# EAGLE board ALU (EAGLE 9.3.2)
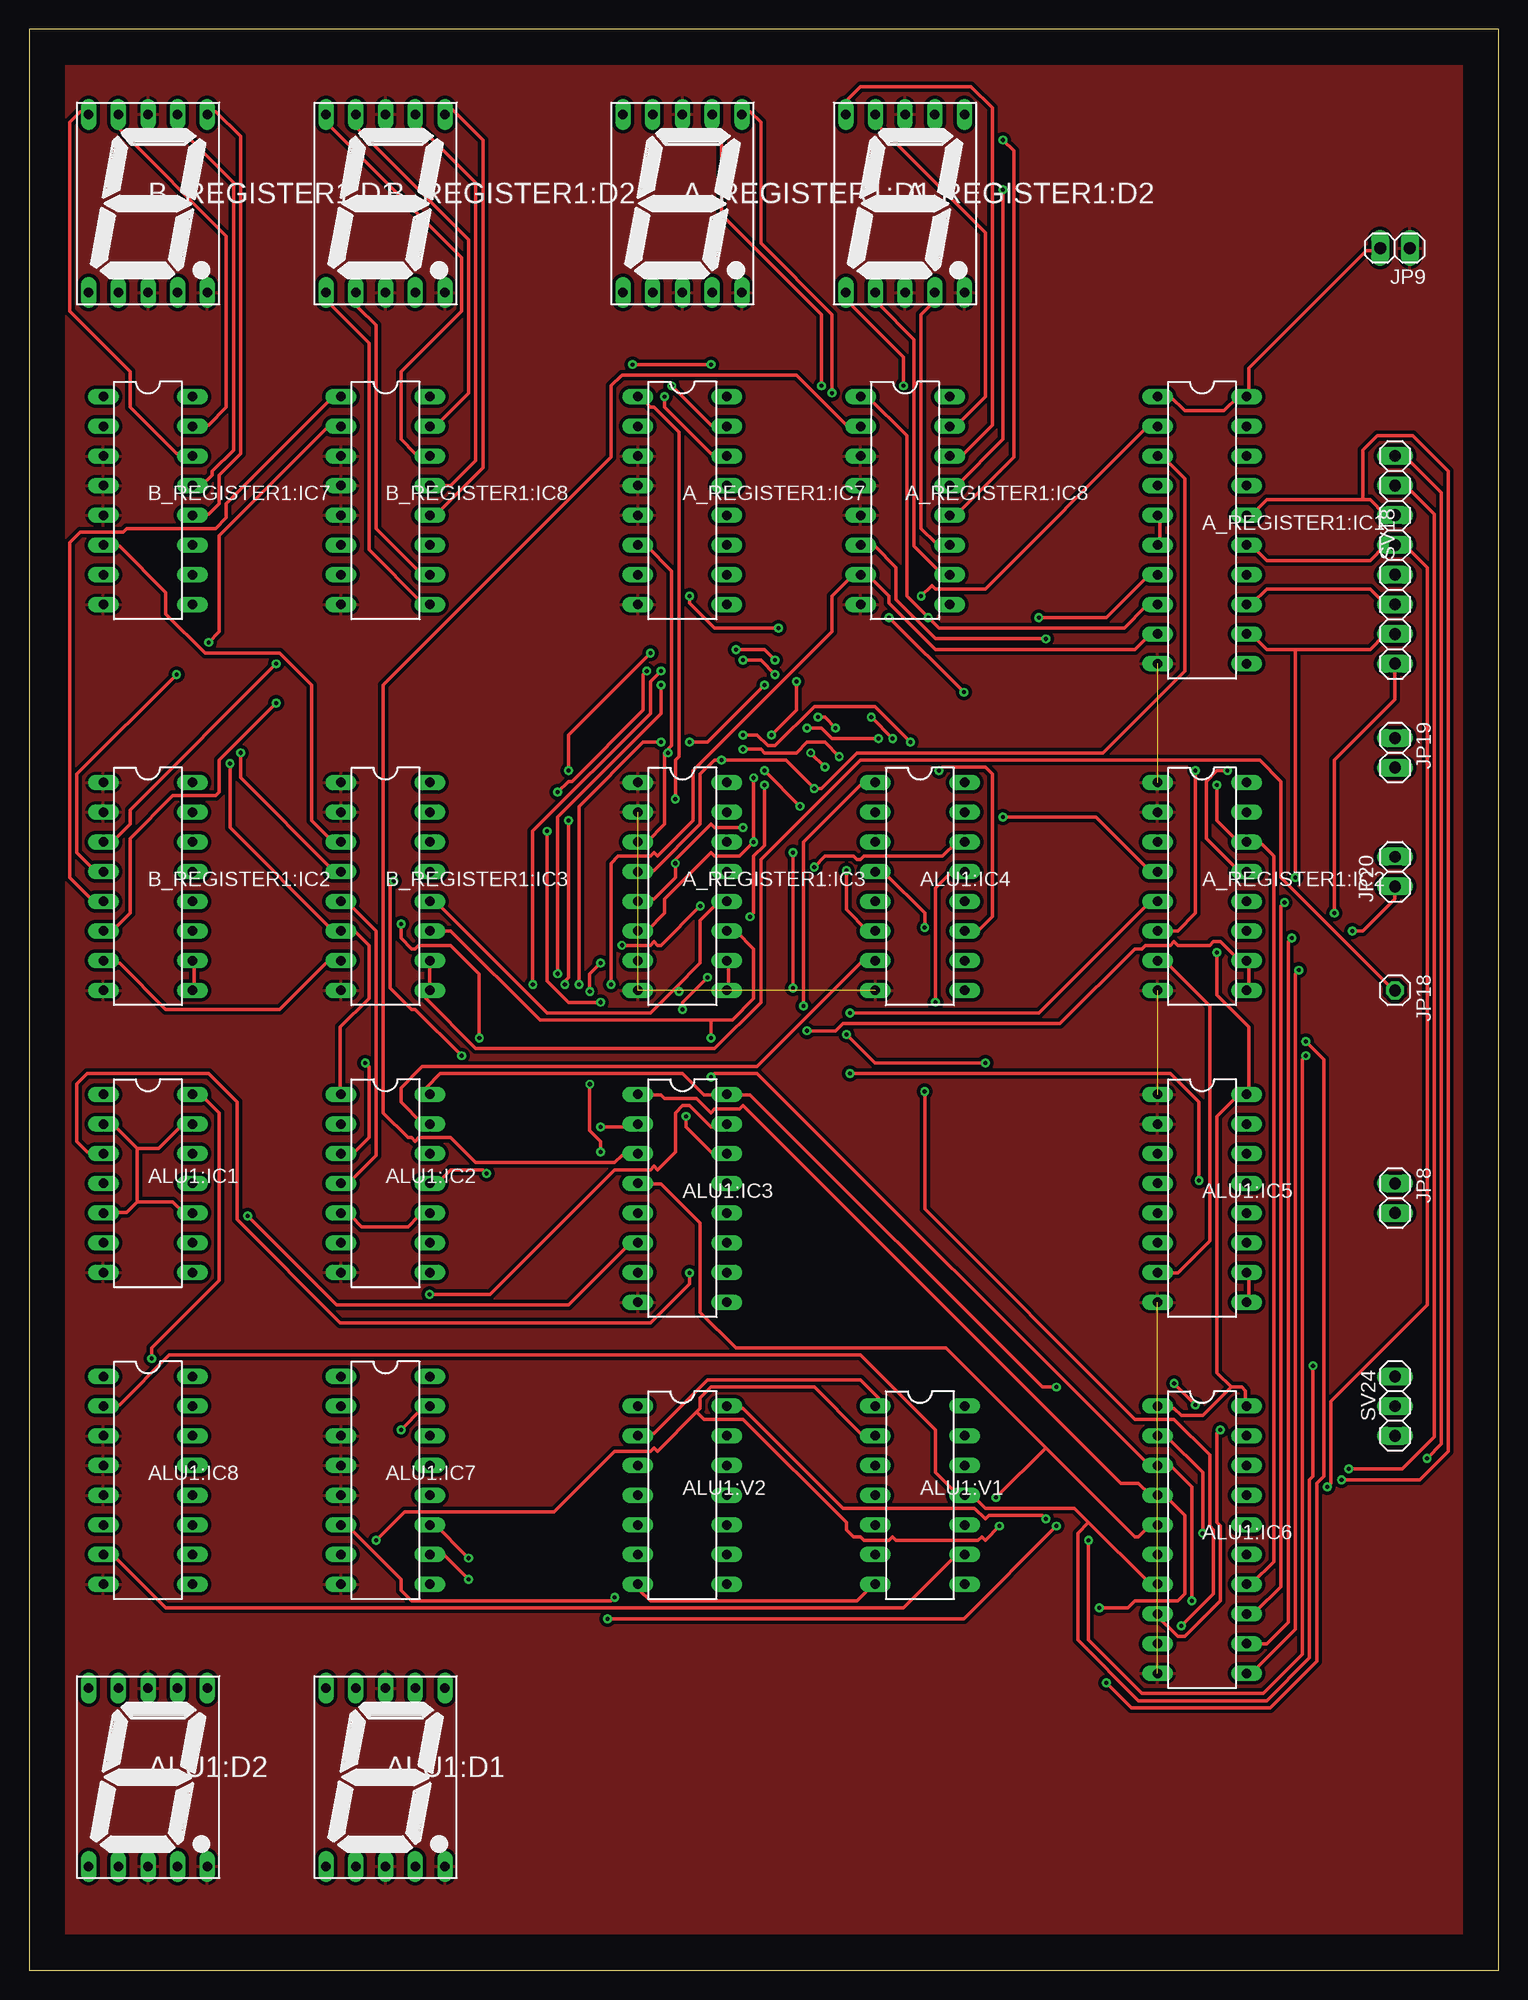
[diagram p0: board, top side]
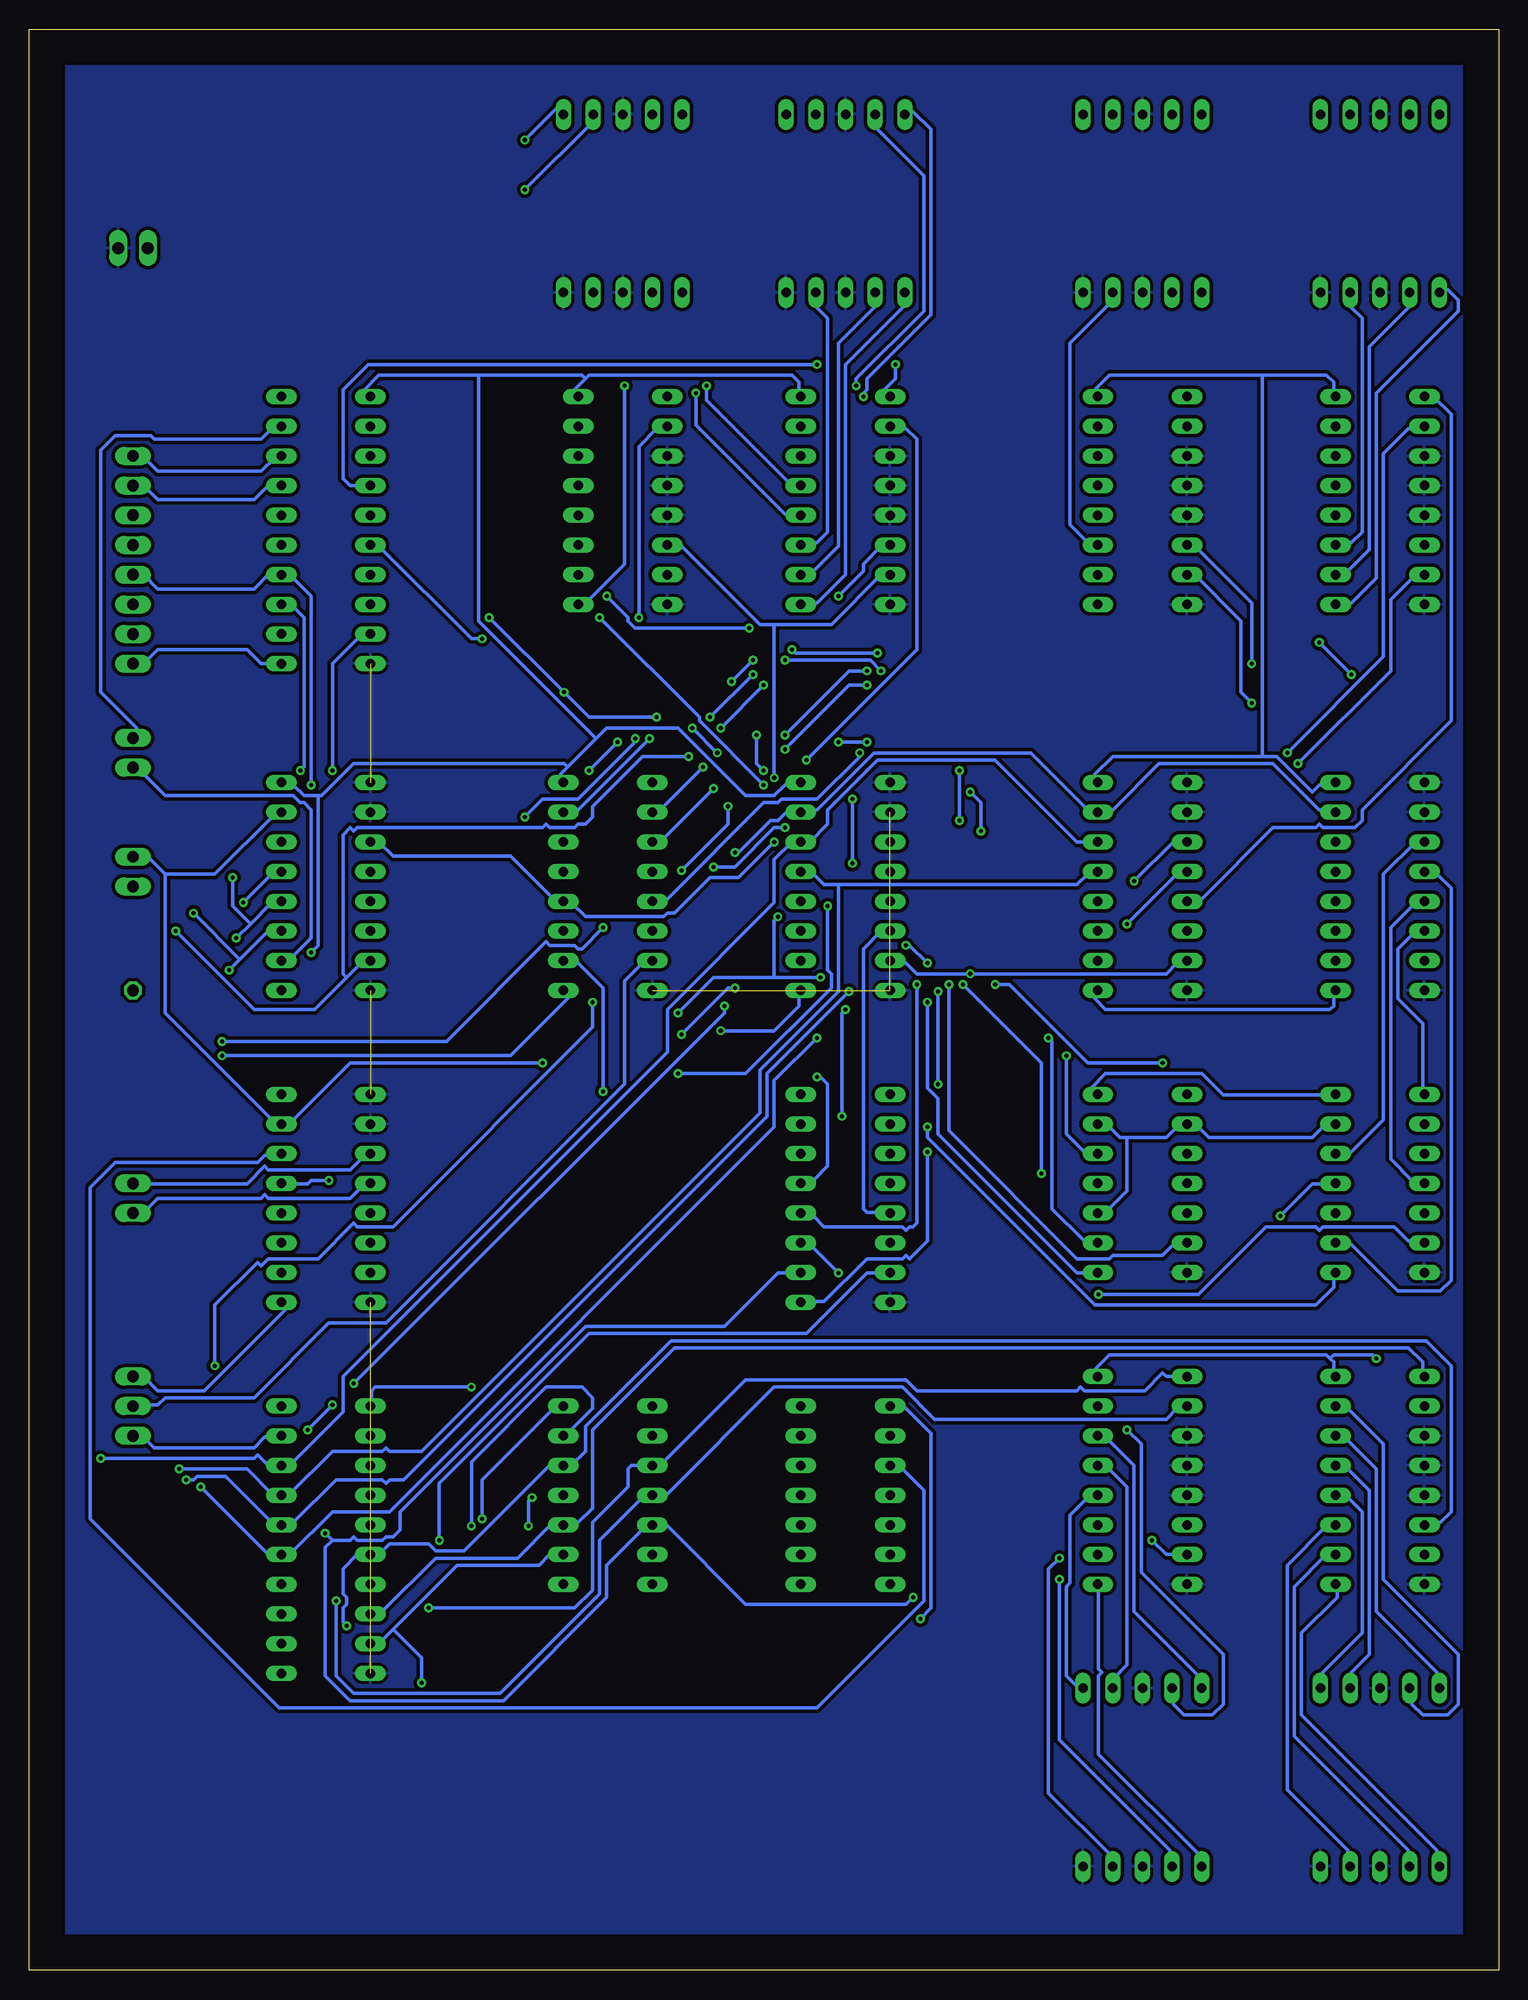
[diagram p1: board, bottom side, seen from below]

Size 125.71 x 166.04 mm. Coordinates in mm from the lower left corner, seen from the top.
Outline: 0,0 125.71,0 125.71,166.04 0,166.04 0,0
Copper layers (1*16): Top 0.035mm / dielectric 1.5mm / Bottom 0.035mm
Design rules "Endustriyel": minimum track width 12mil, minimum drill 0.35mm, track to track 12mil, track to pad 12mil, pad to pad 12mil, via to via 12mil, smd to smd 6mil, copper to edge 120mil, drill to drill 12mil, minimum pad ring 10mil, minimum via ring 8mil, stop-mask expansion 4mil, vias tented up to drill 0mil, thermal gap 10mil
Net classes: 0 default: width 0.254 mm

## Footprints (pad centres in the part's own frame; a part is rotated, then mirrored left to right if it is on the bottom)
7SEG-13 = drill 0.813 long: 1 -5.08,-7.62; 2 -2.54,-7.62; 3 0,-7.62; 4 2.54,-7.62; 5 5.08,-7.62; 6 5.08,7.62; 7 2.54,7.62; 8 0,7.62; 9 -2.54,7.62; 10 -5.08,7.62
DIL20 = drill 0.813 long: 1 -11.43,-3.81; 2 -8.89,-3.81; 3 -6.35,-3.81; 4 -3.81,-3.81; 5 -1.27,-3.81; 6 1.27,-3.81; 7 3.81,-3.81; 8 6.35,-3.81; 9 8.89,-3.81; 10 11.43,-3.81; 11 11.43,3.81; 12 8.89,3.81; 13 6.35,3.81; 14 3.81,3.81; 15 1.27,3.81; 16 -1.27,3.81; 17 -3.81,3.81; 18 -6.35,3.81; 19 -8.89,3.81; 20 -11.43,3.81
DIL16 = drill 0.813 long: 1 -8.89,-3.81; 2 -6.35,-3.81; 3 -3.81,-3.81; 4 -1.27,-3.81; 5 1.27,-3.81; 6 3.81,-3.81; 7 6.35,-3.81; 8 8.89,-3.81; 9 8.89,3.81; 10 6.35,3.81; 11 3.81,3.81; 12 1.27,3.81; 13 -1.27,3.81; 14 -3.81,3.81; 15 -6.35,3.81; 16 -8.89,3.81
DIL14 = drill 0.813 long: 1 -7.62,-3.81; 2 -5.08,-3.81; 3 -2.54,-3.81; 4 0,-3.81; 5 2.54,-3.81; 6 5.08,-3.81; 7 7.62,-3.81; 8 7.62,3.81; 9 5.08,3.81; 10 2.54,3.81; 11 0,3.81; 12 -2.54,3.81; 13 -5.08,3.81; 14 -7.62,3.81
1X02 = drill 1.016 long: 1 -1.27,0; 2 1.27,0
1X01 = drill 1.016 octagon: 1 0,0
1X08 = drill 1.016 long: 1 -8.89,0; 2 -6.35,0; 3 -3.81,0; 4 -1.27,0; 5 1.27,0; 6 3.81,0; 7 6.35,0; 8 8.89,0
1X03 = drill 1.016 long: 1 -2.54,0; 2 0,0; 3 2.54,0

## Placement (x,y rotation side)
A_REGISTER1:D1  [7SEG-13]  55.88,151.13 0 top
A_REGISTER1:D2  [7SEG-13]  74.93,151.13 0 top
A_REGISTER1:IC1  74ACT245N  [DIL20]  100.33,123.19 270 top
A_REGISTER1:IC2  74HC173N  [DIL16]  100.33,92.71 270 top
A_REGISTER1:IC3  74HC173N  [DIL16]  55.88,92.71 270 top
A_REGISTER1:IC7  74LS47N  [DIL16]  55.88,125.73 270 top
A_REGISTER1:IC8  74LS47N  [DIL16]  74.93,125.73 270 top
ALU1:D1  [7SEG-13]  30.48,16.51 0 top
ALU1:D2  [7SEG-13]  10.16,16.51 0 top
ALU1:IC1  74LS86N  [DIL14]  10.16,67.31 270 top
ALU1:IC2  74LS86N  [DIL14]  30.48,67.31 270 top
ALU1:IC3  74AC283N  [DIL16]  55.88,66.04 270 top
ALU1:IC4  74AC283N  [DIL16]  76.2,92.71 270 top
ALU1:IC5  74HC173N  [DIL16]  100.33,66.04 270 top
ALU1:IC6  74ACT245N  [DIL20]  100.33,36.83 270 top
ALU1:IC7  74LS47N  [DIL16]  30.48,41.91 270 top
ALU1:IC8  74LS47N  [DIL16]  10.16,41.91 270 top
ALU1:V1  744002N  [DIL14]  76.2,40.64 270 top
ALU1:V2  7409N  [DIL14]  55.88,40.64 270 top
B_REGISTER1:D1  [7SEG-13]  10.16,151.13 0 top
B_REGISTER1:D2  [7SEG-13]  30.48,151.13 0 top
B_REGISTER1:IC2  74HC173N  [DIL16]  10.16,92.71 270 top
B_REGISTER1:IC3  74HC173N  [DIL16]  30.48,92.71 270 top
B_REGISTER1:IC7  74LS47N  [DIL16]  10.16,125.73 270 top
B_REGISTER1:IC8  74LS47N  [DIL16]  30.48,125.73 270 top
JP8  [1X02]  116.84,66.04 270 top
JP9  [1X02]  116.84,147.32 180 top
JP18  [1X01]  116.84,83.82 270 top
JP19  [1X02]  116.84,104.14 270 top
JP20  [1X02]  116.84,93.98 90 top
SV18  [1X08]  116.84,120.65 90 top
SV24  [1X03]  116.84,48.26 270 top

## Library data of the parts
A_REGISTER1:D1 A_REGISTER1:D2 ALU1:D1 ALU1:D2 B_REGISTER1:D1 B_REGISTER1:D2 = special
A_REGISTER1:IC1-A_REGISTER1:IC3 A_REGISTER1:IC7 A_REGISTER1:IC8 ALU1:IC3-ALU1:IC8 B_REGISTER1:IC2 B_REGISTER1:IC3 B_REGISTER1:IC7 B_REGISTER1:IC8 = 74xx-eu
ALU1:IC1 ALU1:IC2 = 74xx-us
ALU1:V1 ALU1:V2 = 74ttl-din
JP8 JP9 JP18-JP20 = pinhead
SV18 SV24 = pinhead; OC_FARNELL: unknown; OC_NEWARK: unknown

## Nets
8B_1: A_REGISTER1:IC1.18 A_REGISTER1:IC3.14 ALU1:IC6.18 B_REGISTER1:IC3.14 SV18.8
8B_2: A_REGISTER1:IC1.17 A_REGISTER1:IC3.13 ALU1:IC6.17 B_REGISTER1:IC3.13 SV18.7
8B_3: A_REGISTER1:IC1.16 A_REGISTER1:IC3.12 ALU1:IC6.16 B_REGISTER1:IC3.12 SV18.6
8B_4: A_REGISTER1:IC1.15 A_REGISTER1:IC3.11 ALU1:IC6.15 B_REGISTER1:IC3.11 SV18.5
8B_5: A_REGISTER1:IC1.14 A_REGISTER1:IC2.14 ALU1:IC6.14 SV18.4
8B_6: A_REGISTER1:IC1.13 A_REGISTER1:IC2.13 ALU1:IC6.13 SV18.3
8B_7: A_REGISTER1:IC1.12 A_REGISTER1:IC2.12 ALU1:IC6.12 SV18.2
8B_8: A_REGISTER1:IC1.11 A_REGISTER1:IC2.11 ALU1:IC6.11 SV18.1
A_REGISTER1:N$9: A_REGISTER1:D1.7 A_REGISTER1:IC7.13
A_REGISTER1:N$10: A_REGISTER1:D1.6 A_REGISTER1:IC7.12
A_REGISTER1:N$11: A_REGISTER1:D1.4 A_REGISTER1:IC7.11
A_REGISTER1:N$12: A_REGISTER1:D1.2 A_REGISTER1:IC7.10
A_REGISTER1:N$13: A_REGISTER1:D1.1 A_REGISTER1:IC7.9
A_REGISTER1:N$14: A_REGISTER1:D1.9 A_REGISTER1:IC7.15
A_REGISTER1:N$15: A_REGISTER1:D1.10 A_REGISTER1:IC7.14
A_REGISTER1:N$16: A_REGISTER1:D2.7 A_REGISTER1:IC8.13
A_REGISTER1:N$21: A_REGISTER1:D2.6 A_REGISTER1:IC8.12
A_REGISTER1:N$22: A_REGISTER1:D2.4 A_REGISTER1:IC8.11
A_REGISTER1:N$23: A_REGISTER1:D2.2 A_REGISTER1:IC8.10
A_REGISTER1:N$24: A_REGISTER1:D2.1 A_REGISTER1:IC8.9
A_REGISTER1:N$29: A_REGISTER1:D2.9 A_REGISTER1:IC8.15
A_REGISTER1:N$30: A_REGISTER1:D2.10 A_REGISTER1:IC8.14
ALU1:+UB: ALU1:V1.14 ALU1:V2.14
ALU1:-UB: ALU1:V1.7 ALU1:V2.7
ALU1:A_9: ALU1:IC4.4 ALU1:IC6.9 ALU1:IC8.7 ALU1:V1.9
ALU1:A_10: ALU1:IC4.1 ALU1:IC6.8 ALU1:IC8.1 ALU1:V1.10
ALU1:A_11: ALU1:IC4.10 ALU1:IC6.6 ALU1:IC8.6 ALU1:V1.12
ALU1:A_12: ALU1:IC4.13 ALU1:IC6.7 ALU1:IC8.2 ALU1:V1.11
ALU1:A_13: ALU1:IC3.4 ALU1:IC6.5 ALU1:IC7.7 ALU1:V1.2
ALU1:A_14: ALU1:IC3.1 ALU1:IC6.4 ALU1:IC7.1 ALU1:V1.3
ALU1:A_15: ALU1:IC3.13 ALU1:IC6.3 ALU1:IC7.2 ALU1:V1.4
ALU1:A_16: ALU1:IC3.10 ALU1:IC6.2 ALU1:IC7.6 ALU1:V1.5
ALU1:N$1: ALU1:IC2.11 ALU1:IC4.6
ALU1:N$2: ALU1:IC2.8 ALU1:IC4.2
ALU1:N$3: ALU1:IC2.6 ALU1:IC4.15
ALU1:N$4: ALU1:IC2.3 ALU1:IC4.11
ALU1:N$5: ALU1:IC1.11 ALU1:IC3.6
ALU1:N$6: ALU1:IC1.6 ALU1:IC3.15
ALU1:N$7: ALU1:IC1.8 ALU1:IC3.2
ALU1:N$8: ALU1:IC1.3 ALU1:IC3.11
ALU1:N$9: ALU1:IC3.7 ALU1:IC4.9
ALU1:N$10: ALU1:D1.7 ALU1:IC7.13
ALU1:N$11: ALU1:D1.6 ALU1:IC7.12
ALU1:N$12: ALU1:D1.4 ALU1:IC7.11
ALU1:N$13: ALU1:D1.2 ALU1:IC7.10
ALU1:N$14: ALU1:D1.1 ALU1:IC7.9
ALU1:N$15: ALU1:D1.9 ALU1:IC7.15
ALU1:N$16: ALU1:D1.10 ALU1:IC7.14
ALU1:N$17: ALU1:D2.7 ALU1:IC8.13
ALU1:N$18: ALU1:V1.1 ALU1:V2.2
ALU1:N$19: ALU1:V1.13 ALU1:V2.1
ALU1:N$20: ALU1:IC5.14 ALU1:V2.3
ALU1:N$21: ALU1:D2.6 ALU1:IC8.12
ALU1:N$22: ALU1:D2.4 ALU1:IC8.11
ALU1:N$23: ALU1:D2.2 ALU1:IC8.10
ALU1:N$24: ALU1:D2.1 ALU1:IC8.9
ALU1:N$25: ALU1:IC3.9 ALU1:IC5.13
ALU1:N$29: ALU1:D2.9 ALU1:IC8.15
ALU1:N$30: ALU1:D2.10 ALU1:IC8.14
B_REGISTER1:8B_9: B_REGISTER1:IC2.11
B_REGISTER1:8B_10: B_REGISTER1:IC2.12
B_REGISTER1:8B_11: B_REGISTER1:IC2.13
B_REGISTER1:8B_12: B_REGISTER1:IC2.14
B_REGISTER1:N$9: B_REGISTER1:D1.7 B_REGISTER1:IC7.13
B_REGISTER1:N$10: B_REGISTER1:D1.6 B_REGISTER1:IC7.12
B_REGISTER1:N$11: B_REGISTER1:D1.4 B_REGISTER1:IC7.11
B_REGISTER1:N$12: B_REGISTER1:D1.2 B_REGISTER1:IC7.10
B_REGISTER1:N$13: B_REGISTER1:D1.1 B_REGISTER1:IC7.9
B_REGISTER1:N$14: B_REGISTER1:D1.9 B_REGISTER1:IC7.15
B_REGISTER1:N$15: B_REGISTER1:D1.10 B_REGISTER1:IC7.14
B_REGISTER1:N$16: B_REGISTER1:D2.7 B_REGISTER1:IC8.13
B_REGISTER1:N$21: B_REGISTER1:D2.6 B_REGISTER1:IC8.12
B_REGISTER1:N$22: B_REGISTER1:D2.4 B_REGISTER1:IC8.11
B_REGISTER1:N$23: B_REGISTER1:D2.2 B_REGISTER1:IC8.10
B_REGISTER1:N$24: B_REGISTER1:D2.1 B_REGISTER1:IC8.9
B_REGISTER1:N$29: B_REGISTER1:D2.9 B_REGISTER1:IC8.15
B_REGISTER1:N$30: B_REGISTER1:D2.10 B_REGISTER1:IC8.14
B_REGISTER1:VCC: B_REGISTER1:IC2.16 B_REGISTER1:IC3.16 B_REGISTER1:IC7.16 B_REGISTER1:IC8.16
CF: ALU1:IC5.4 JP8.2
CLK: A_REGISTER1:IC2.7 A_REGISTER1:IC3.7 ALU1:IC5.7 B_REGISTER1:IC2.7 B_REGISTER1:IC3.7 JP20.1
CLR: A_REGISTER1:IC2.15 A_REGISTER1:IC3.15 ALU1:IC5.15 B_REGISTER1:IC2.15 B_REGISTER1:IC3.15 JP20.2
GND: A_REGISTER1:D1.3 A_REGISTER1:D1.5 A_REGISTER1:D1.8 A_REGISTER1:D2.3 A_REGISTER1:D2.5 A_REGISTER1:D2.8 A_REGISTER1:IC1.10 A_REGISTER1:IC2.1 A_REGISTER1:IC2.2 A_REGISTER1:IC2.8 A_REGISTER1:IC3.1 A_REGISTER1:IC3.2 A_REGISTER1:IC3.8 A_REGISTER1:IC7.3 A_REGISTER1:IC7.4 A_REGISTER1:IC7.5 A_REGISTER1:IC7.8 A_REGISTER1:IC8.3 A_REGISTER1:IC8.4 A_REGISTER1:IC8.5 A_REGISTER1:IC8.8 ALU1:D1.3 ALU1:D1.5 ALU1:D1.8 ALU1:D2.3 ALU1:D2.5 ALU1:D2.8 ALU1:IC1.7 ALU1:IC2.7 ALU1:IC3.8 ALU1:IC4.8 ALU1:IC5.1 ALU1:IC5.2 ALU1:IC5.8 ALU1:IC6.10 ALU1:IC7.3 ALU1:IC7.4 ALU1:IC7.5 ALU1:IC7.8 ALU1:IC8.3 ALU1:IC8.4 ALU1:IC8.5 ALU1:IC8.8 B_REGISTER1:D1.3 B_REGISTER1:D1.5 B_REGISTER1:D1.8 B_REGISTER1:D2.3 B_REGISTER1:D2.5 B_REGISTER1:D2.8 B_REGISTER1:IC2.1 B_REGISTER1:IC2.2 B_REGISTER1:IC2.8 B_REGISTER1:IC3.1 B_REGISTER1:IC3.2 B_REGISTER1:IC3.8 B_REGISTER1:IC7.3 B_REGISTER1:IC7.4 B_REGISTER1:IC7.5 B_REGISTER1:IC7.8 B_REGISTER1:IC8.3 B_REGISTER1:IC8.4 B_REGISTER1:IC8.5 B_REGISTER1:IC8.8 JP9.1
N$17: A_REGISTER1:IC1.2 A_REGISTER1:IC3.3 A_REGISTER1:IC7.6 ALU1:IC4.5
N$18: A_REGISTER1:IC1.3 A_REGISTER1:IC3.4 A_REGISTER1:IC7.2 ALU1:IC4.3
N$19: A_REGISTER1:IC1.4 A_REGISTER1:IC3.5 A_REGISTER1:IC7.1 ALU1:IC4.14
N$20: A_REGISTER1:IC1.5 A_REGISTER1:IC1.6 A_REGISTER1:IC2.3 A_REGISTER1:IC3.6 A_REGISTER1:IC7.7 A_REGISTER1:IC8.6 ALU1:IC3.5 ALU1:IC4.12
N$21: A_REGISTER1:IC1.7 A_REGISTER1:IC2.4 A_REGISTER1:IC8.2 ALU1:IC3.3
N$22: A_REGISTER1:IC1.8 A_REGISTER1:IC2.5 A_REGISTER1:IC8.1 ALU1:IC3.14
N$23: A_REGISTER1:IC1.9 A_REGISTER1:IC2.6 A_REGISTER1:IC8.7 ALU1:IC3.12
N$24: ALU1:IC2.12 B_REGISTER1:IC3.3 B_REGISTER1:IC7.6
N$25: ALU1:IC2.9 B_REGISTER1:IC3.4 B_REGISTER1:IC7.2
N$26: ALU1:IC2.4 B_REGISTER1:IC3.5 B_REGISTER1:IC7.1
N$27: ALU1:IC2.1 B_REGISTER1:IC3.6 B_REGISTER1:IC7.7
N$28: ALU1:IC1.12 B_REGISTER1:IC2.3 B_REGISTER1:IC8.6
N$29: ALU1:IC1.9 B_REGISTER1:IC2.4 B_REGISTER1:IC8.2
N$30: ALU1:IC1.4 B_REGISTER1:IC2.5 B_REGISTER1:IC8.1
N$31: ALU1:IC1.1 B_REGISTER1:IC2.6 B_REGISTER1:IC8.7
SUB: ALU1:IC1.2 ALU1:IC1.5 ALU1:IC1.10 ALU1:IC1.13 ALU1:IC2.2 ALU1:IC2.5 ALU1:IC2.10 ALU1:IC2.13 ALU1:IC4.7 SV24.2
VCC: A_REGISTER1:IC1.1 A_REGISTER1:IC1.20 A_REGISTER1:IC2.16 A_REGISTER1:IC3.16 A_REGISTER1:IC7.16 A_REGISTER1:IC8.16 ALU1:IC1.14 ALU1:IC2.14 ALU1:IC3.16 ALU1:IC4.16 ALU1:IC5.16 ALU1:IC6.1 ALU1:IC6.20 ALU1:IC7.16 ALU1:IC8.16 JP9.2
ZF: ALU1:IC5.3 JP8.1
|ALUWRITE: ALU1:IC6.19 SV24.3
|AREAD: A_REGISTER1:IC2.9 A_REGISTER1:IC2.10 A_REGISTER1:IC3.9 A_REGISTER1:IC3.10 JP19.2
|AWRITE: A_REGISTER1:IC1.19 JP19.1
|BREAD: B_REGISTER1:IC2.9 B_REGISTER1:IC2.10 B_REGISTER1:IC3.9 B_REGISTER1:IC3.10 JP18.1
|FL: ALU1:IC5.9 ALU1:IC5.10 SV24.1

## Tracks (layer width: path | path; a pad name or v marks a point on that pad's centre or on a via)
8B_1  (via drill 0.35)
  Top 0.305: v119.58,43.79 120.8,45.01 120.8,126.39 117.75,129.44 116.84,129.44 SV18.8
  Bottom 0.305: A_REGISTER1:IC1.18 104.34,129.44 104.65,129.44 105.87,128.22 114.71,128.22 115.93,129.44 116.84,129.44 SV18.8 | B_REGISTER1:IC3.14 36.07,96.52 43.08,103.53 53.14,103.53 57.4,99.26 57.4,98.04 58.93,96.52 A_REGISTER1:IC3.14 60.45,96.52 61.98,95 61.98,91.34 71.12,82.19 71.12,78.54 98.86,50.8 98.86,47.75 103.43,43.18 ALU1:IC6.18 105.26,43.18 106.17,44.09 106.48,43.79 v119.58,43.79
8B_2  (via drill 0.35)
  Top 0.305: SV18.7 117.75,127 120.19,124.56 120.19,45.62 117.45,42.88 v112.88,42.88
  Bottom 0.305: A_REGISTER1:IC1.17 105.26,127 106.48,125.78 114.71,125.78 115.93,127 SV18.7 | 56.49,92.86 57.71,92.86 58.62,93.78 59.54,93.78 A_REGISTER1:IC3.13 | 56.49,92.86 36.07,92.86 35.15,93.78 34.54,93.78 B_REGISTER1:IC3.13 | 56.49,92.86 56.49,83.72 63.19,77.01 63.19,73.35 92.15,44.4 94.89,44.4 95.2,44.7 95.5,44.4 99.77,44.4 103.43,40.74 104.04,40.74 ALU1:IC6.17 104.34,40.74 104.95,40.74 107.09,42.88 v112.88,42.88
8B_3  (via drill 0.35)
  Top 0.305: 114.1,125.78 114.71,125.78 115.93,124.56 116.84,124.56 SV18.6 | 114.1,125.78 105.87,125.78 104.65,124.56 104.34,124.56 A_REGISTER1:IC1.16 | 55.27,84.02 57.4,86.16 57.4,89.81 58.93,91.34 59.54,91.34 A_REGISTER1:IC3.12 | 55.27,84.02 53.14,81.89 44.3,81.89 34.85,91.34 34.54,91.34 B_REGISTER1:IC3.12 | 55.27,84.02 v55.58,83.72 | 114.1,125.78 114.1,130.05 115.32,131.27 118.36,131.27 121.41,128.22 121.41,44.4 118.97,41.96 v112.27,41.96
  Bottom 0.305: v55.58,83.72 62.59,76.71 62.59,73.05 93.67,41.96 94.89,41.96 95.2,41.66 95.5,41.96 99.47,41.96 103.12,38.3 104.04,38.3 ALU1:IC6.16 104.34,38.3 104.95,38.3 108.91,42.27 111.35,42.27 111.66,41.96 v112.27,41.96
8B_4  (via drill 0.35)
  Top 0.305: 116.84,121.82 115.93,121.82 114.71,120.6 105.87,120.6 104.65,121.82 104.34,121.82 A_REGISTER1:IC1.15 | B_REGISTER1:IC3.11 36.07,88.9 43.69,81.28 58.32,81.28 | 58.32,81.28 60.15,81.28 61.98,83.11 61.98,87.38 60.45,88.9 A_REGISTER1:IC3.11 | 58.32,81.28 v58.32,79.76 | 116.84,121.82 117.75,121.82 119.58,119.99 119.58,56.9 111.35,48.67 111.35,41.66 v111.05,41.35 | 116.84,121.82 SV18.5
  Bottom 0.305: v58.32,79.76 61.98,76.1 61.98,72.14 94.89,39.22 99.77,39.22 103.43,35.56 ALU1:IC6.15 105.26,35.56 v111.05,41.35
8B_5  (via drill 0.35)
  Top 0.305: ALU1:IC6.14 104.34,33.12 104.65,33.12 106.48,34.95 106.48,95.3 105.26,96.52 A_REGISTER1:IC2.14 103.43,96.52 101.6,98.35 v101.6,101.4
  Bottom 0.305: SV18.4 115.93,119.38 114.71,118.16 106.48,118.16 105.26,119.38 A_REGISTER1:IC1.14 103.43,119.38 101.6,117.55 v101.6,101.4
8B_6  (via drill 0.35)
  Top 0.305: A_REGISTER1:IC1.13 104.34,116.94 104.65,116.94 105.87,118.16 114.71,118.16 115.93,116.94 116.84,116.94 SV18.3 | v107.39,91.34 107.09,91.03 107.09,32.82 104.95,30.68 104.34,30.68 ALU1:IC6.13 | v102.51,102.62 101.6,102.62 100.69,101.7 100.69,96.82 103.43,94.08 104.04,94.08 A_REGISTER1:IC2.13
  Bottom 0.305: v107.39,91.34 104.95,93.78 104.34,93.78 A_REGISTER1:IC2.13 | v102.51,102.62 102.21,102.92 102.21,115.72 103.12,116.64 104.04,116.64 A_REGISTER1:IC1.13
8B_7  (via drill 0.35)
  Top 0.305: 108.31,112.98 114.71,112.98 115.93,114.2 116.84,114.2 SV18.2 | 108.31,112.98 105.87,112.98 104.65,114.2 104.34,114.2 A_REGISTER1:IC1.12 | ALU1:IC6.12 105.87,27.94 107.7,29.77 107.7,87.99 v108,88.29 | v108.31,93.47 108.31,112.98
  Bottom 0.305: 106.78,89.51 104.95,91.34 104.34,91.34 A_REGISTER1:IC2.12 | 106.78,89.51 v108,88.29 | v108.31,93.47 108.31,91.03 106.78,89.51
8B_8  (via drill 0.35)
  Top 0.305: v108.61,85.55 108.31,85.24 108.31,29.16 104.65,25.5 104.34,25.5 ALU1:IC6.11 | SV18.1 116.84,108.71 111.66,103.53 v111.66,90.42
  Bottom 0.305: A_REGISTER1:IC1.11 105.87,111.76 107.09,112.98 114.71,112.98 115.93,111.76 SV18.1 | 107.7,86.46 105.26,88.9 A_REGISTER1:IC2.11 | 107.7,86.46 v108.61,85.55 | 107.7,86.46 v111.66,90.42
A_REGISTER1:N$9  (via drill 0.35)
  Top 0.305: v67.77,135.53 67.77,141.63 59.23,150.17 59.23,156.87 58.62,157.48 58.62,158.7 A_REGISTER1:D1.7
  Bottom 0.305: A_REGISTER1:IC7.13 60.45,127 67.77,134.31 v67.77,135.53
A_REGISTER1:N$10  (via drill 0.35)
  Top 0.305: v68.68,134.93 68.68,141.63 62.59,147.73 62.59,158.09 61.67,159 61.06,159 A_REGISTER1:D1.6
  Bottom 0.305: v68.68,134.93 68.68,132.18 61.06,124.56 59.84,124.56 A_REGISTER1:IC7.12
A_REGISTER1:N$11
  Bottom 0.305: A_REGISTER1:IC7.11 59.54,122.12 58.32,122.12 57.4,123.04 57.4,141.33 58.32,142.24 58.32,143.46 A_REGISTER1:D1.4
A_REGISTER1:N$12
  Bottom 0.305: A_REGISTER1:IC7.10 58.93,119.38 56.49,121.82 56.49,139.19 53.44,142.24 53.44,143.46 A_REGISTER1:D1.2
A_REGISTER1:N$13
  Bottom 0.305: A_REGISTER1:IC7.9 59.54,116.94 58.32,116.94 55.88,119.38 55.88,137.36 51,142.24 51,143.46 A_REGISTER1:D1.1
A_REGISTER1:N$14  (via drill 0.35)
  Top 0.305: v54.97,135.53 58.32,132.18 59.54,132.18 A_REGISTER1:IC7.15
  Bottom 0.305: v54.97,135.53 54.97,136.14 49.17,141.94 49.17,153.52 53.14,157.48 53.14,158.7 A_REGISTER1:D1.9
A_REGISTER1:N$15  (via drill 0.35)
  Top 0.305: v54.36,134.62 54.36,133.71 58.32,129.74 59.54,129.74 A_REGISTER1:IC7.14
  Bottom 0.305: v54.36,134.62 54.36,134.93 54.05,135.23 54.05,136.14 48.56,141.63 48.56,157.48 50.09,159 50.7,159 A_REGISTER1:D1.10
A_REGISTER1:N$16  (via drill 0.35)
  Top 0.305: A_REGISTER1:IC8.13 79.35,127 83.31,130.96 v83.31,152.3
  Bottom 0.305: v83.31,152.3 77.52,158.09 77.52,158.7 A_REGISTER1:D2.7
A_REGISTER1:N$21  (via drill 0.35)
  Top 0.305: v83.31,156.57 84.23,155.65 84.23,129.44 79.35,124.56 78.74,124.56 A_REGISTER1:IC8.12
  Bottom 0.305: v83.31,156.57 80.57,159.31 80.26,159.31 79.96,159 A_REGISTER1:D2.6
A_REGISTER1:N$22
  Top 0.305: A_REGISTER1:IC8.11 78.74,122.12 77.52,122.12 76.3,123.34 76.3,141.63 77.22,142.55 77.22,143.46 A_REGISTER1:D2.4
A_REGISTER1:N$23
  Top 0.305: A_REGISTER1:IC8.10 78.13,119.38 75.69,121.82 75.69,139.5 72.64,142.55 72.64,143.46 A_REGISTER1:D2.2
A_REGISTER1:N$24  (via drill 0.35)
  Top 0.305: v74.78,135.53 74.78,137.97 69.9,142.85 69.9,143.46 A_REGISTER1:D2.1
  Bottom 0.305: v74.78,135.53 74.78,120.29 78.13,116.94 78.74,116.94 A_REGISTER1:IC8.9
A_REGISTER1:N$29
  Top 0.305: A_REGISTER1:IC8.15 78.74,132.18 79.35,132.18 81.79,134.62 81.79,148.64 72.64,157.78 72.64,158.7 A_REGISTER1:D2.9
A_REGISTER1:N$30
  Top 0.305: A_REGISTER1:IC8.14 78.74,129.74 79.96,129.74 82.4,132.18 82.4,159.31 80.57,161.14 71.12,161.14 69.9,159.92 69.9,159 A_REGISTER1:D2.10
ALU1:+UB  (via drill 0.35)
  Top 0.305: v86.97,38.61 86.66,38.91 82.09,38.91 81.79,38.61 80.87,39.52 69.6,39.52 61.06,48.06 59.84,48.06 ALU1:V2.14
  Bottom 0.305: v86.97,38.61 86.97,41.96 80.87,48.06 80.26,48.06 ALU1:V1.14
ALU1:-UB
  Top 0.305: ALU1:V2.7 52.22,32.82 52.22,32.51 53.14,31.6 70.81,31.6 72.34,33.12 ALU1:V1.7
ALU1:A_9  (via drill 0.35)
  Top 0.305: ALU1:IC8.7 7.11,35.56 11.68,30.99 74.78,30.99 79.35,35.56 ALU1:V1.9 | v76.61,89.2 76.61,90.42 73.25,93.78 72.64,93.78 ALU1:IC4.4 | v109.22,79.45 110.74,77.93 110.74,42.27 110.13,41.66 110.13,26.42 106.17,22.45 94.28,22.45 v92.15,24.59
  Bottom 0.305: ALU1:IC6.9 95.81,27.94 94.59,29.16 | 94.59,29.16 89.1,34.65 82.09,34.65 81.18,35.56 ALU1:V1.9 | v76.61,89.2 78.44,87.38 78.74,87.38 79.05,87.68 81.18,87.68 81.48,87.99 90.02,79.45 v109.22,79.45 | v92.15,24.59 92.15,26.72 94.59,29.16
ALU1:A_10  (via drill 0.35)
  Top 0.305: v66.24,82.5 66.24,96.52 71.12,101.4 72.34,101.4 ALU1:IC4.1 | v99.77,48.36 v97.94,50.19 | v101.91,46.23 101.6,45.92 101.6,38.3 101.91,38 101.91,31.6 98.86,28.55 98.25,28.55 96.42,30.38 ALU1:IC6.8
  Bottom 0.305: ALU1:IC8.1 6.5,50.8 6.5,52.02 7.72,53.24 70.51,53.24 77.52,46.23 77.52,39.52 78.74,38.3 79.96,38.3 ALU1:V1.10 80.26,38 81.18,38 83.92,35.26 90.93,35.26 95.5,30.68 96.42,30.68 ALU1:IC6.8 | v66.24,82.5 66.24,81.89 v97.94,50.19 | v101.91,46.23 v99.77,48.36
ALU1:A_11  (via drill 0.35)
  Top 0.305: v76.61,75.18 76.61,65.13 94.59,47.14 97.94,47.14 100.99,44.09 100.99,38 101.3,37.69 101.3,32.21 v98.55,29.46
  Bottom 0.305: ALU1:IC8.6 6.2,38.3 4.98,38.3 4.06,39.22 4.06,51.71 6.2,53.85 70.81,53.85 78.13,46.53 78.13,44.4 79.35,43.18 ALU1:V1.12 81.18,43.18 88.49,35.87 90.93,35.87 91.54,36.47 94.89,36.47 95.81,35.56 ALU1:IC6.6 97.64,35.56 98.86,34.34 98.86,32.21 98.55,31.9 98.55,31.29 98.86,30.99 98.86,29.77 v98.55,29.46 | v76.61,75.18 76.61,84.02 78.74,86.16 79.96,86.16 ALU1:IC4.10
ALU1:A_12  (via drill 0.35)
  Top 0.305: ALU1:IC8.2 6.5,48.36 7.72,48.36 11.99,52.63 71.12,52.63 77.52,46.23 77.52,42.57 79.35,40.74 79.96,40.74 ALU1:V1.11 80.26,40.44 80.87,40.44 81.79,39.52 89.41,39.52 90.63,38.3 | 90.63,38.3 95.81,33.12 96.42,33.12 ALU1:IC6.7 | v77.52,82.8 77.52,92.56 78.74,93.78 79.96,93.78 ALU1:IC4.13 | v109.83,51.71 109.83,42.27 109.52,41.96 109.52,26.72 105.87,23.06 94.89,23.06 89.71,28.25 89.71,37.39 90.63,38.3
  Bottom 0.305: v77.52,82.8 77.52,80.67 94.59,63.6 97.64,63.6 97.94,63.91 100.99,60.86 105.26,60.86 105.87,60.25 106.17,60.55 109.83,56.9 v109.83,51.71
ALU1:A_13  (via drill 0.35)
  Top 0.305: v29.67,36.78 32.11,39.22 44.91,39.22 50.09,44.4 53.14,44.4 53.44,44.7 53.75,44.4 57.1,47.75 | 57.1,47.75 57.4,48.06 57.4,48.97 58.32,49.89 67.16,49.89 71.12,45.92 72.34,45.92 ALU1:V1.2 | 86.97,44.7 94.59,37.08 94.89,37.08 95.81,38 96.42,38 ALU1:IC6.5 | 86.97,44.7 78.44,53.24 60.45,53.24 57.4,56.29 57.4,63.91 54.05,67.26 52.22,67.26 ALU1:IC3.4 | 57.1,47.75 57.71,47.14 61.06,47.14 69.9,38.3 69.9,37.69 70.51,37.08 71.12,37.08 71.42,36.78 73.56,36.78 73.86,37.08 74.17,36.78 81.18,36.78 81.48,37.08 81.79,36.78 v83.01,38 | 86.97,44.7 v82.7,40.44
  Bottom 0.305: ALU1:IC7.7 28.45,35.56 v29.67,36.78 | v83.01,38 83.01,40.13 v82.7,40.44
ALU1:A_14  (via drill 0.35)
  Top 0.305: ALU1:IC3.1 52.22,74.88 54.05,74.88 54.36,74.57 57.1,74.57 58.32,73.35 58.62,73.66 60.76,73.66 61.06,73.96 93.37,41.66 94.89,41.66 95.81,40.74 96.42,40.74 ALU1:IC6.4 96.72,40.44 97.33,40.44 98.86,38.91 98.86,32.21 98.25,31.6 94.59,31.6 93.98,30.99 v91.54,30.99
  Bottom 0.305: ALU1:IC7.1 28.45,50.8 28.75,51.11 30.28,49.58 35.46,49.58 35.76,49.89 36.07,49.58 49.78,49.58 50.7,50.49 64.41,50.49 71.73,43.18 ALU1:V1.3 74.17,43.18 74.47,42.88 74.47,41.35 77.52,38.3 77.52,32.51 79.05,30.99 v91.54,30.99
ALU1:A_15  (via drill 0.35)
  Top 0.305: v58.32,76.4 58.62,76.71 62.28,76.71 95.81,43.18 ALU1:IC6.3 97.64,43.18 99.47,41.35 v99.47,31.6
  Bottom 0.305: ALU1:IC7.2 26.92,48.06 27.53,48.06 28.45,47.14 48.26,47.14 51,49.89 61.98,49.89 71.12,40.74 72.34,40.74 ALU1:V1.4 72.64,40.44 73.25,40.44 76.91,36.78 76.91,32.21 85.45,23.67 97.94,23.67 99.47,25.2 v99.47,31.6 | v58.32,76.4 58.01,76.4 57.4,75.79 57.4,68.78 58.62,67.56 59.54,67.56 ALU1:IC3.13
ALU1:A_16  (via drill 0.35)
  Top 0.305: v50.09,31.9 49.78,31.6 32.72,31.6 31.8,32.51 31.8,33.43 27.23,38 26.92,38 ALU1:IC7.6 | v100.38,37.39 100.38,42.57 97.33,45.62 96.72,45.62 ALU1:IC6.2
  Bottom 0.305: v50.09,31.9 50.7,31.29 64.41,31.29 71.12,38 72.34,38 ALU1:V1.5 72.64,38 72.95,38 76.3,34.65 76.3,31.9 85.14,23.06 98.25,23.06 100.38,25.2 100.38,36.17 99.77,36.78 | 99.77,36.78 98.25,36.78 97.94,37.08 97.64,36.78 95.5,36.78 95.2,37.08 94.59,37.08 93.98,37.69 93.98,39.22 78.13,55.07 66.24,55.07 61.67,59.64 59.84,59.64 ALU1:IC3.10 | v100.38,37.39 99.77,36.78
ALU1:N$1  (via drill 0.35)
  Top 0.305: v39.12,68.17 38.81,68.48 36.07,68.48 35.15,67.56 34.54,67.56 ALU1:IC2.11 | v45.82,84.33 45.82,84.63 46.13,84.94 v46.13,98.35 | v46.13,102.62 46.13,105.66 v53.14,112.67 | v60.45,112.98 62.89,112.98 v63.8,112.06 | v65.63,110.24 65.63,107.8 v63.5,105.66 | v65.94,99.57 v62.89,102.62 | v69.9,94.08 69.9,90.73 71.73,88.9 ALU1:IC4.6
  Bottom 0.305: v39.12,68.17 39.12,77.62 v45.82,84.33 | v46.13,102.62 v46.13,98.35 | v53.14,112.67 60.15,112.67 v60.45,112.98 | v65.63,110.24 v63.8,112.06 | v63.5,105.66 63.5,103.23 v62.89,102.62 | v65.94,99.57 65.94,98.04 v69.9,94.08
ALU1:N$2  (via drill 0.35)
  Top 0.305: v48.87,82.8 46.13,82.8 44.3,84.63 v44.3,97.43 | v45.21,100.79 46.13,101.7 46.43,101.7 52.53,107.8 52.53,110.85 v52.83,111.15 | v61.06,112.06 62.59,112.06 v63.8,110.85 | v67.46,107.19 68.07,107.19 v68.99,106.27 | v68.07,102.92 v66.85,104.14
  Bottom 0.305: v48.87,82.8 48.87,75.49 47.95,74.57 47.95,71.53 36.07,59.64 34.54,59.64 ALU1:IC2.8 | v44.3,97.43 44.3,99.87 v45.21,100.79 | v52.83,111.15 53.75,112.06 v61.06,112.06 | v67.46,107.19 v63.8,110.85 | v66.85,104.14 v68.99,106.27 | v68.07,102.92 71.73,99.26 72.34,99.26 ALU1:IC4.2
ALU1:N$3  (via drill 0.35)
  Top 0.305: v47.04,84.33 47.04,99.57 52.53,105.05 v54.05,105.05 | v56.49,105.05 58.01,105.05 v62.89,109.93 | v66.55,106.27 67.77,106.27 68.68,105.36 v72.64,105.36
  Bottom 0.305: v47.04,84.33 47.04,71.83 36.07,60.86 33.33,60.86 33.02,61.16 28.75,61.16 27.84,62.08 26.92,62.08 ALU1:IC2.6 | v56.49,105.05 v54.05,105.05 | v66.55,106.27 v62.89,109.93 | v72.64,105.36 78.74,99.26 79.96,99.26 ALU1:IC4.15
ALU1:N$4  (via drill 0.35)
  Top 0.305: v28.75,77.62 29.06,77.32 29.06,71.22 27.84,70 26.92,70 ALU1:IC2.3 | v43.08,84.33 43.08,97.43 53.14,107.49 53.14,110.24 v54.05,111.15 | v61.06,105.66 62.28,105.66 63.19,104.75 63.8,104.75 67.16,108.1 72.34,108.1 v75.39,105.05 | v77.83,102.62 78.13,102.92 81.79,102.92 82.4,102.31 82.4,90.12 81.18,88.9 ALU1:IC4.11
  Bottom 0.305: v28.75,77.62 35.15,77.62 41.86,84.33 v43.08,84.33 | v54.05,111.15 55.58,111.15 v61.06,105.66 | v77.83,102.62 v75.39,105.05
ALU1:N$5  (via drill 0.35)
  Top 0.305: v18.69,64.52 26.31,56.9 46.13,56.9 51.31,62.08 51.92,62.08 ALU1:IC3.6
  Bottom 0.305: v18.69,64.52 15.95,67.26 14.12,67.26 ALU1:IC1.11
ALU1:N$6  (via drill 0.35)
  Top 0.305: v34.24,57.81 39.42,57.81 50.09,68.48 53.14,68.48 53.44,68.78 53.75,68.48 55.27,70 55.27,73.35 55.88,73.96 56.49,73.96 58.32,72.14 59.54,72.14 ALU1:IC3.15
  Bottom 0.305: v34.24,57.81 25.71,57.81 19.91,63.6 15.65,63.6 15.34,63.3 15.04,63.6 8.94,63.6 7.72,62.38 6.5,62.38 ALU1:IC1.6
ALU1:N$7  (via drill 0.35)
  Top 0.305: v48.87,72.14 51.92,72.14 ALU1:IC3.2
  Bottom 0.305: v48.87,72.14 48.87,71.22 34.54,56.9 15.65,56.9 14.12,58.42 14.12,59.64 ALU1:IC1.8
ALU1:N$8  (via drill 0.35)
  Top 0.305: v56.49,59.64 56.49,58.73 53.14,55.37 26.62,55.37 17.78,64.21 17.78,74.27 15.34,76.71 4.98,76.71 4.06,75.79 4.06,70.92 4.98,70 6.2,70 ALU1:IC1.3
  Bottom 0.305: v56.49,59.64 58.93,62.08 59.54,62.08 ALU1:IC3.11
ALU1:N$9  (via drill 0.35)
  Top 0.305: v90.63,36.78 90.63,28.25 95.2,23.67 105.56,23.67 108.91,27.03 108.91,77.93 v109.22,78.23
  Bottom 0.305: v90.63,36.78 90.63,41.66 77.83,54.46 59.23,54.46 54.05,59.64 52.22,59.64 ALU1:IC3.7 | v109.22,78.23 84.53,78.23 79.65,83.11 79.65,83.41 79.96,83.72 ALU1:IC4.9
ALU1:N$10
  Bottom 0.305: ALU1:D1.7 33.02,24.89 31.8,26.11 31.8,41.35 33.63,43.18 ALU1:IC7.13
ALU1:N$11
  Bottom 0.305: ALU1:D1.6 35.76,24.28 36.07,24.28 36.98,25.2 36.98,32.82 36.68,33.12 36.68,38.91 35.15,40.44 34.54,40.44 ALU1:IC7.12
ALU1:N$12  (via drill 0.35)
  Top 0.305: v37.59,35.26 34.54,38.3 ALU1:IC7.11
  Bottom 0.305: ALU1:D1.4 33.02,9.65 38.51,15.14 38.51,34.34 v37.59,35.26
ALU1:N$13  (via drill 0.35)
  Top 0.305: v37.59,33.43 35.46,35.56 ALU1:IC7.10
  Bottom 0.305: v37.59,33.43 37.59,19.71 28.14,10.26 28.14,9.04 ALU1:D1.2
ALU1:N$14
  Bottom 0.305: ALU1:D1.1 25.4,9.65 34.24,18.49 34.24,25.2 33.93,25.5 34.24,25.81 34.24,32.82 ALU1:IC7.9
ALU1:N$15  (via drill 0.35)
  Top 0.305: v31.8,46.23 33.63,48.06 34.24,48.06 ALU1:IC7.15
  Bottom 0.305: v31.8,46.23 30.58,45.01 30.58,34.04 23.57,27.03 23.57,22.76 24.49,21.84 26.92,21.84 27.84,22.76 27.84,23.98 ALU1:D1.9
ALU1:N$16
  Bottom 0.305: ALU1:D1.10 25.4,24.89 31.19,30.68 31.19,43.18 33.63,45.62 34.24,45.62 ALU1:IC7.14
ALU1:N$17
  Bottom 0.305: ALU1:IC8.13 13.21,43.18 11.07,41.05 11.07,27.03 12.6,25.5 12.6,24.28 ALU1:D2.7
ALU1:N$18
  Top 0.305: ALU1:V2.2 52.22,45.92 53.44,45.92 58.01,50.49 71.12,50.49 72.64,48.97 72.64,48.36 ALU1:V1.1
ALU1:N$19  (via drill 0.35)
  Top 0.305: v49.48,30.07 79.96,30.07 v87.88,38
  Bottom 0.305: v49.48,30.07 48.56,30.99 48.56,45.92 50.7,48.06 51.92,48.06 ALU1:V2.1 | v87.88,38 87.88,43.48 81.48,49.89 78.44,49.89 77.52,48.97 77.52,48.06 79.96,45.62 ALU1:V1.13
ALU1:N$20
  Bottom 0.305: ALU1:V2.3 51.31,43.18 49.17,41.05 49.17,31.6 58.32,22.45 104.34,22.45 120.5,38.61 120.5,66.95 118.36,69.09 106.17,69.09 105.56,69.7 104.34,69.7 ALU1:IC5.14
ALU1:N$21
  Bottom 0.305: ALU1:D2.6 15.04,24.28 15.04,25.5 11.68,28.85 11.68,39.22 12.9,40.44 13.82,40.44 ALU1:IC8.12
ALU1:N$22
  Bottom 0.305: ALU1:D2.4 12.9,9.04 12.9,10.26 18.09,15.44 18.09,34.65 14.73,38 14.12,38 ALU1:IC8.11
ALU1:N$23
  Bottom 0.305: ALU1:IC8.10 14.73,35.56 17.48,32.82 17.48,20.02 7.72,10.26 7.72,9.04 ALU1:D2.2
ALU1:N$24
  Bottom 0.305: ALU1:D2.1 5.28,9.04 5.28,10.26 16.87,21.84 16.87,28.85 13.82,31.9 13.82,32.82 ALU1:IC8.9
ALU1:N$25  (via drill 0.35)
  Top 0.305: v48.87,70 48.87,70.92 47.95,71.83 v47.95,75.79 | v47.95,83.72 47.95,85.24 v48.87,86.16 | v50.7,87.68 53.14,87.68 53.44,87.99 53.75,87.68 54.05,87.68 v57.4,91.03 | v70.21,76.71 97.64,76.71 100.08,74.27 v100.08,67.56
  Bottom 0.305: v48.87,70 48.87,62.38 50.39,60.86 50.7,61.16 51,60.86 54.05,60.86 57.71,57.2 59.54,57.2 ALU1:IC3.9 | v47.95,83.72 v47.95,75.79 | v48.87,86.16 50.39,87.68 v50.7,87.68 | v57.4,91.03 57.4,85.55 57.1,85.24 57.1,84.02 64.41,76.71 v70.21,76.71 | v100.08,67.56 101.6,67.56 101.91,67.26 104.04,67.26 ALU1:IC5.13
ALU1:N$29
  Bottom 0.305: ALU1:D2.9 7.42,23.98 7.42,22.76 6.5,21.84 4.37,21.84 3.45,22.76 3.45,27.03 9.86,33.43 9.86,45.01 12.9,48.06 13.82,48.06 ALU1:IC8.15
ALU1:N$30
  Bottom 0.305: ALU1:D2.10 5.28,24.28 5.28,25.5 10.46,30.68 10.46,42.88 13.21,45.62 13.82,45.62 ALU1:IC8.14
B_REGISTER1:N$9
  Top 0.305: B_REGISTER1:IC7.13 14.73,127 15.65,127.91 15.65,128.22 17.48,130.05 17.48,152.91 12.9,157.48 12.9,158.7 B_REGISTER1:D1.7
B_REGISTER1:N$10
  Top 0.305: B_REGISTER1:IC7.12 14.12,124.56 15.34,124.56 16.26,125.48 16.26,127.91 18.09,129.74 18.09,156.87 15.95,159 15.34,159 B_REGISTER1:D1.6
B_REGISTER1:N$11
  Bottom 0.305: B_REGISTER1:IC7.11 13.82,122.12 12.6,122.12 11.68,123.04 11.68,141.33 12.6,142.24 12.6,143.46 B_REGISTER1:D1.4
B_REGISTER1:N$12
  Bottom 0.305: B_REGISTER1:IC7.10 13.21,119.38 11.07,121.51 11.07,138.89 7.72,142.24 7.72,143.46 B_REGISTER1:D1.2
B_REGISTER1:N$13
  Bottom 0.305: B_REGISTER1:IC7.9 13.82,116.94 12.6,116.94 10.46,119.07 10.46,134.93 3.45,141.94 3.45,142.85 4.37,143.76 4.98,143.76 B_REGISTER1:D1.1
B_REGISTER1:N$14
  Top 0.305: B_REGISTER1:IC7.15 14.12,132.18 15.34,132.18 16.87,133.71 16.87,148.34 7.72,157.48 7.72,158.7 B_REGISTER1:D1.9
B_REGISTER1:N$15
  Top 0.305: B_REGISTER1:IC7.14 13.82,129.74 12.6,129.74 8.64,133.71 8.64,136.75 3.45,141.94 3.45,158.09 4.37,159 4.98,159 B_REGISTER1:D1.10
B_REGISTER1:N$16
  Top 0.305: B_REGISTER1:IC8.13 36.07,127 38.2,129.13 38.2,152.91 33.02,158.09 B_REGISTER1:D2.7
B_REGISTER1:N$21
  Top 0.305: B_REGISTER1:IC8.12 34.54,124.56 34.85,124.56 38.81,128.52 38.81,156.57 36.07,159.31 35.76,159.31 35.46,159 B_REGISTER1:D2.6
B_REGISTER1:N$22
  Bottom 0.305: B_REGISTER1:D2.4 33.02,142.85 36.68,139.19 36.68,123.65 35.15,122.12 34.54,122.12 B_REGISTER1:IC8.11
B_REGISTER1:N$23
  Top 0.305: B_REGISTER1:IC8.10 33.63,119.38 29.67,123.34 29.67,140.72 28.14,142.24 28.14,143.46 B_REGISTER1:D2.2
B_REGISTER1:N$24
  Top 0.305: B_REGISTER1:D2.1 25.4,142.85 29.06,139.19 29.06,121.51 33.63,116.94 34.24,116.94 B_REGISTER1:IC8.9
B_REGISTER1:N$29
  Top 0.305: B_REGISTER1:IC8.15 34.54,132.18 34.85,132.18 37.59,134.93 37.59,148.03 28.14,157.48 28.14,158.7 B_REGISTER1:D2.9
B_REGISTER1:N$30
  Top 0.305: B_REGISTER1:D2.10 25.4,158.09 36.98,146.51 36.98,141.94 31.8,136.75 31.8,130.96 33.02,129.74 34.24,129.74 B_REGISTER1:IC8.14
B_REGISTER1:VCC
  Bottom 0.305: 20.22,136.45 33.33,136.45 34.54,135.23 34.54,134.62 B_REGISTER1:IC8.16 | 20.22,136.45 14.73,136.45 14.12,135.84 14.12,134.62 B_REGISTER1:IC7.16 | 20.22,103.83 33.02,103.83 34.54,102.31 34.54,101.7 B_REGISTER1:IC3.16 | 20.22,103.83 19,103.83 15.95,100.79 15.34,101.4 14.12,101.4 B_REGISTER1:IC2.16 | 20.22,103.83 20.22,136.45
CF
  Bottom 0.305: ALU1:IC5.4 96.72,67.26 97.03,67.26 98.25,66.04 105.26,66.04 105.56,66.34 105.87,66.04 114.71,66.04 115.93,64.82 116.84,64.82 JP8.2
CLK  (via drill 0.35)
  Top 0.305: B_REGISTER1:IC2.7 6.5,86.16 7.72,86.16 11.68,82.19 21.44,82.19 25.4,86.16 26.62,86.16 B_REGISTER1:IC3.7 | ALU1:IC5.7 96.72,59.64 98.25,59.64 100.99,62.38 100.99,82.5 97.33,86.16 96.72,86.16 A_REGISTER1:IC2.7 | JP20.1 116.84,91.64 114.1,88.9 v113.18,88.9 | v45.21,85.24 45.21,98.65 54.05,107.49 v54.05,109.93 | v61.06,104.44 62.59,104.44 62.89,104.14 65.63,104.14 66.55,105.05 68.07,105.05 v69.29,103.83
  Bottom 0.305: A_REGISTER1:IC3.7 51.92,86.16 50.7,86.16 49.78,85.24 v45.21,85.24 28.45,85.24 27.53,86.16 26.92,86.16 B_REGISTER1:IC3.7 | v113.18,88.9 106.48,82.19 101.3,82.19 98.55,84.94 | 98.55,84.94 97.33,86.16 96.72,86.16 A_REGISTER1:IC2.7 | v54.05,109.93 55.58,109.93 v61.06,104.44 | v69.29,103.83 73.25,103.83 77.52,99.57 77.52,98.65 78.13,98.04 78.74,98.04 79.05,97.74 81.18,97.74 81.48,98.04 81.79,97.74 97.64,97.74 97.94,97.43 98.25,97.74 98.86,97.13 98.86,85.24 98.55,84.94
CLR  (via drill 0.35)
  Top 0.305: v81.79,77.62 72.34,77.62 v69.9,80.06 | v65.33,95.61 v65.33,84.02
  Bottom 0.305: 114.1,93.78 114.1,81.89 104.65,72.44 104.34,72.44 ALU1:IC5.15 104.04,72.44 103.43,72.44 98.25,77.62 v81.79,77.62 | 114.1,93.78 115.32,95 116.84,95 JP20.2 | 114.1,93.78 109.83,93.78 104.65,98.96 104.34,98.96 A_REGISTER1:IC2.15 | B_REGISTER1:IC2.15 14.12,99.26 15.34,99.26 19.3,103.23 29.06,103.23 33.02,99.26 34.24,99.26 B_REGISTER1:IC3.15 34.54,99.26 35.15,99.26 40.03,104.14 53.44,104.14 58.32,99.26 59.54,99.26 A_REGISTER1:IC3.15 59.84,98.96 61.06,98.96 61.67,98.35 62.28,98.35 65.02,95.61 v65.33,95.61 | v69.9,80.06 65.94,84.02 v65.33,84.02
GND  (5 unrouted)
  pour Top: -2.54,168.91 -2.54,-2.54 132.08,-2.54 132.08,168.91
  pour Bottom: -5.08,171.45 -5.08,-6.35 135.89,-6.35 135.89,171.45
N$17  (via drill 0.35)
  Top 0.305: A_REGISTER1:IC3.3 52.83,96.52 54.36,98.04 54.36,104.14 | 54.36,104.14 54.97,104.75 54.97,119.68 52.83,121.82 52.22,121.82 A_REGISTER1:IC7.6 | 54.36,104.14 v54.66,104.14 | v76.3,117.55 77.22,118.47 77.52,118.16 81.79,118.16 95.5,131.88 96.42,131.88 A_REGISTER1:IC1.2 | v64.11,114.81 58.62,114.81 56.49,116.94 v56.49,117.55
  Bottom 0.305: v54.66,104.14 54.66,103.83 58.32,100.18 61.37,100.18 61.67,99.87 62.89,99.87 71.12,91.64 72.34,91.64 ALU1:IC4.5 | v76.3,117.55 74.47,115.72 74.47,115.42 73.86,114.81 v64.11,114.81 | v56.49,117.55 54.36,119.68 54.36,120.29 52.83,121.82 52.22,121.82 A_REGISTER1:IC7.6
N$18  (via drill 0.35)
  Top 0.305: A_REGISTER1:IC3.4 52.22,94.08 53.44,94.08 57.4,98.04 57.4,102.31 58.62,103.53 v59.23,103.53 64.72,103.53 v67.16,101.09 67.77,101.09 70.81,104.14 91.85,104.14 98.86,111.15 98.86,127.61 97.03,129.44 96.72,129.44 A_REGISTER1:IC1.3
  Bottom 0.305: v67.16,101.09 71.73,96.52 ALU1:IC4.3 | v59.23,103.53 49.78,112.98 49.78,130.96 50.7,131.88 51.92,131.88 A_REGISTER1:IC7.2
N$19  (via drill 0.35)
  Top 0.305: v55.27,100.18 55.27,103.53 55.58,103.83 55.58,131.57 53.44,133.71 53.14,133.71 52.22,134.62 A_REGISTER1:IC7.1 | A_REGISTER1:IC3.5 52.22,91.64 53.44,91.64 55.27,93.47 v55.27,94.69 55.27,95 58.32,98.04 58.62,97.74 v61.06,97.74 | ALU1:IC4.14 79.35,96.52 78.13,95.3 71.42,95.3 71.12,95 70.81,95 70.51,95.3 68.07,95.3 v67.16,94.39 | v51.61,137.36 v58.32,137.36
  Bottom 0.305: v55.27,100.18 v55.27,94.69 | v67.16,94.39 65.33,94.39 61.98,97.74 v61.06,97.74 | A_REGISTER1:IC1.4 98.25,127 98.86,127.61 98.86,135.23 96.72,137.36 v58.32,137.36 | v51.61,137.36 51.61,136.14 52.53,135.23 52.53,134.93 52.22,134.62 A_REGISTER1:IC7.1
N$20  (via drill 0.35)
  Top 0.305: A_REGISTER1:IC1.6 96.72,122.12 96.72,124.26 A_REGISTER1:IC1.5 | v86.97,113.89 77.52,113.89 74.17,117.25 74.17,119.99 72.34,121.82 71.12,121.82 A_REGISTER1:IC8.6 | A_REGISTER1:IC3.6 52.83,88.9 54.36,90.42 54.36,91.64 58.32,95.61 58.62,95.3 60.76,95.3 v61.98,96.52 v61.98,102.01
  Bottom 0.305: A_REGISTER1:IC7.7 52.83,119.38 57.1,115.11 61.98,115.11 | 61.98,115.11 63.19,115.11 69.9,121.82 71.12,121.82 A_REGISTER1:IC8.6 | v86.97,113.89 87.88,113.89 95.81,121.82 96.42,121.82 A_REGISTER1:IC1.6 | A_REGISTER1:IC2.3 95.81,96.52 94.59,95.3 84.53,95.3 80.87,91.64 80.26,91.64 ALU1:IC4.12 79.96,91.34 79.35,91.34 78.13,90.12 71.42,90.12 71.12,90.42 70.51,90.42 67.46,93.47 65.02,93.47 v61.98,96.52 | A_REGISTER1:IC3.6 52.83,88.9 54.36,87.38 54.36,65.13 54.05,64.82 52.22,64.82 ALU1:IC3.5 | v61.98,102.01 61.98,115.11
N$21  (via drill 0.35)
  Top 0.305: v83.31,98.65 91.24,98.65 95.81,94.08 96.42,94.08 A_REGISTER1:IC2.4 | v72.03,107.19 v73.86,105.36 | v86.36,115.72 92.15,115.72 95.81,119.38 A_REGISTER1:IC1.7 | ALU1:IC3.3 51.92,69.7 50.7,69.7 50.09,69.09 38.2,69.09 36.07,71.22 33.33,71.22 33.02,70.92 32.72,71.22 32.41,71.22 30.28,73.35 30.28,109.93 49.78,129.44 49.78,135.53 50.7,136.45 65.63,136.45 69.9,132.18 71.12,132.18 A_REGISTER1:IC8.2 | v73.56,115.72 v79.96,109.32
  Bottom 0.305: v83.31,98.65 81.79,100.18 78.74,100.18 73.86,105.05 v73.86,105.36 | v72.03,107.19 77.83,107.19 v79.96,109.32 v86.36,115.72 | v73.56,115.72 73.56,130.35 72.03,131.88 71.12,131.88 A_REGISTER1:IC8.2
N$22  (via drill 0.35)
  Top 0.305: A_REGISTER1:IC8.1 71.73,134.62 75.08,131.27 75.08,117.55 v76.91,115.72 77.83,114.81 93.67,114.81 95.5,116.64 96.42,116.64 A_REGISTER1:IC1.8 | v56.19,73.05 56.19,72.14 58.32,70 59.54,70 ALU1:IC3.14 | v55.88,82.19 55.88,82.8 v58.01,84.94 | v70.21,81.89 86.36,81.89 95.81,91.34 96.42,91.34 A_REGISTER1:IC2.5 | v62.89,101.4 62.89,96.21 61.98,95.3 61.98,90.42 v61.67,90.12
  Bottom 0.305: v56.19,73.05 56.19,81.89 v55.88,82.19 | 61.98,84.94 67.16,84.94 v70.21,81.89 | 61.98,84.94 v58.01,84.94 | v76.91,115.72 68.38,107.19 68.38,106.88 v62.89,101.4 | v61.67,90.12 61.98,89.81 61.98,84.94
N$23  (via drill 0.35)
  Top 0.305: A_REGISTER1:IC2.6 98.25,88.9 99.77,90.42 v99.77,102.62 | v49.78,84.33 49.78,94.69 50.39,95.3 53.14,95.3 53.44,95.61 53.75,95.3 56.79,98.35 56.79,102.62 68.68,114.5 68.68,117.55 70.51,119.38 A_REGISTER1:IC8.7 71.73,119.38 73.56,117.55 73.56,116.94 77.52,112.98 94.59,112.98 95.81,114.2 96.42,114.2 A_REGISTER1:IC1.9
  Bottom 0.305: v99.77,102.62 99.77,111.76 97.33,114.2 96.72,114.2 A_REGISTER1:IC1.9 | v49.78,84.33 49.78,63.91 50.09,63.6 50.39,63.6 50.7,63.3 51,63.6 57.71,63.6 58.62,64.52 59.54,64.52 ALU1:IC3.12
N$24  (via drill 0.35)
  Top 0.305: v36.98,78.23 33.02,82.19 32.72,82.19 30.89,84.02 30.89,92.86 v31.19,93.17 | B_REGISTER1:IC3.3 26.01,96.52 24.18,98.35 24.18,109.93 21.44,112.67 15.04,112.67 11.68,116.03 11.68,117.86 7.72,121.82 6.5,121.82 B_REGISTER1:IC7.6
  Bottom 0.305: v36.98,78.23 36.98,71.53 35.46,70 34.54,70 ALU1:IC2.12 | v31.19,93.17 27.84,96.52 B_REGISTER1:IC3.3
N$25  (via drill 0.35)
  Top 0.305: v38.51,79.76 38.51,85.24 36.07,87.68 33.33,87.68 33.02,87.38 32.72,87.38 31.8,88.29 v31.8,89.51 | v18.09,104.14 18.09,102.01 26.01,94.08 26.62,94.08 B_REGISTER1:IC3.4
  Bottom 0.305: v38.51,79.76 38.2,79.45 38.2,65.13 35.46,62.38 34.54,62.38 ALU1:IC2.9 | v31.8,89.51 27.53,93.78 26.92,93.78 B_REGISTER1:IC3.4 | v18.09,104.14 9.86,112.37 9.86,129.74 7.72,131.88 6.5,131.88 B_REGISTER1:IC7.2
N$26
  Top 0.305: ALU1:IC2.4 26.92,67.56 27.53,67.56 29.67,69.7 29.67,88.9 26.92,91.64 B_REGISTER1:IC3.5
  Bottom 0.305: B_REGISTER1:IC7.1 5.59,134.62 4.06,133.1 4.06,106.88 11.68,99.26 11.68,98.35 12.29,97.74 15.04,97.74 15.34,98.04 15.65,97.74 19.3,97.74 25.4,91.64 26.62,91.64 B_REGISTER1:IC3.5
N$27  (via drill 0.35)
  Top 0.305: ALU1:IC2.1 26.62,75.18 26.62,80.67 29.06,83.11 29.06,87.68 27.84,88.9 B_REGISTER1:IC3.6 26.01,88.9 17.17,97.74 v17.17,103.23
  Bottom 0.305: B_REGISTER1:IC7.7 7.11,119.38 9.25,117.25 9.25,111.15 v17.17,103.23
N$28  (via drill 0.35)
  Top 0.305: v21.13,111.76 8.64,99.26 8.64,98.04 7.11,96.52 B_REGISTER1:IC2.3
  Bottom 0.305: B_REGISTER1:IC2.3 7.11,96.52 9.86,93.78 9.86,72.75 12.6,70 13.82,70 ALU1:IC1.12 | v21.13,111.76 21.13,116.94 26.01,121.82 26.62,121.82 B_REGISTER1:IC8.6
N$29  (via drill 0.35)
  Top 0.305: v15.34,113.59 16.26,114.5 16.26,122.73 25.4,131.88 26.62,131.88 B_REGISTER1:IC8.2 | v12.6,110.85 4.06,102.31 4.06,95.61 5.59,94.08 6.2,94.08 B_REGISTER1:IC2.4
  Bottom 0.305: ALU1:IC1.9 13.82,62.08 12.6,62.08 8.64,58.12 4.98,58.12 4.06,59.03 4.06,92.56 5.28,93.78 6.2,93.78 B_REGISTER1:IC2.4 | v12.6,110.85 v15.34,113.59
N$30
  Top 0.305: B_REGISTER1:IC8.1 26.01,134.62 16.87,125.48 16.87,124.26 15.95,123.34 8.33,123.34 8.03,123.04 4.37,123.04 3.45,122.12 3.45,93.47 5.28,91.64 6.2,91.64 B_REGISTER1:IC2.5
  Bottom 0.305: ALU1:IC1.4 6.5,67.56 7.42,67.56 9.25,69.39 9.25,89.2 7.11,91.34 6.5,91.34 B_REGISTER1:IC2.5
N$31  (via drill 0.35)
  Top 0.305: v21.13,108.41 16.26,103.53 16.26,100.79 15.95,100.48 12.29,100.48 8.64,96.82 8.64,90.42 7.11,88.9 B_REGISTER1:IC2.6
  Bottom 0.305: B_REGISTER1:IC2.6 7.11,88.9 8.64,87.38 8.64,83.11 6.5,80.97 6.5,75.18 ALU1:IC1.1 | B_REGISTER1:IC8.7 26.01,119.38 22.05,115.42 22.05,109.32 v21.13,108.41
SUB
  Top 0.305: 9.25,65.73 8.33,64.82 6.5,64.82 ALU1:IC1.5 | 9.25,65.73 12.29,65.73 13.21,64.82 13.82,64.82 ALU1:IC1.10 | 9.25,70.31 7.42,72.14 6.5,72.14 ALU1:IC1.2 | 9.25,65.73 9.25,70.31 | 9.25,70.31 11.07,70.31 12.9,72.14 13.82,72.14 ALU1:IC1.13 | ALU1:IC2.5 26.92,64.52 27.53,64.52 28.45,63.6 32.41,63.6 33.33,64.52 34.24,64.52 ALU1:IC2.10 | ALU1:IC4.7 72.34,86.16 71.12,86.16 62.28,77.32 33.63,77.32 31.8,75.49 31.8,74.27 33.63,72.44 34.24,72.44 ALU1:IC2.13
  Bottom 0.305: 31.8,71.22 32.41,71.22 33.33,72.14 34.24,72.14 ALU1:IC2.13 | 31.8,71.22 28.45,71.22 27.53,72.14 26.92,72.14 ALU1:IC2.2 26.62,72.14 25.71,72.14 24.79,71.22 15.95,71.22 15.04,72.14 14.12,72.14 ALU1:IC1.13 | SV24.2 116.84,48.36 114.71,48.36 114.1,48.97 106.48,48.97 100.08,55.37 95.2,55.37 74.78,75.79 74.78,84.63 73.25,86.16 72.64,86.16 ALU1:IC4.7 | 31.8,71.22 31.8,66.65 33.63,64.82 34.24,64.82 ALU1:IC2.10
VCC  (via drill 0.35)
  Top 0.305: ALU1:IC2.14 34.24,74.88 33.93,75.18 33.93,75.49 35.15,76.71 55.88,76.71 57.71,74.88 59.54,74.88 ALU1:IC3.16 59.84,74.88 61.67,74.88 86.66,49.89 v87.88,49.89 | v10.46,52.32 10.46,53.24 16.26,59.03 16.26,73.35 14.73,74.88 14.12,74.88 ALU1:IC1.14 | A_REGISTER1:IC1.1 97.64,134.62 98.86,133.4 102.21,133.4 103.43,134.62 A_REGISTER1:IC1.20 104.34,134.62 104.34,137.06 114.4,147.12 115.32,147.12 JP9.2 | 102.82,49.89 100.38,47.45 98.55,47.45 97.94,48.06 96.72,48.06 ALU1:IC6.1 | 102.82,49.89 103.73,49.89 104.04,49.58 104.04,48.36 ALU1:IC6.20 | 102.82,49.89 101.6,51.11 101.6,73.05 103.43,74.88 104.04,74.88 ALU1:IC5.16 104.34,75.18 104.34,80.67 101.6,83.41 v101.6,87.07
  Bottom 0.305: 14.43,52.32 14.73,52.63 33.33,52.63 34.54,51.41 34.54,50.8 ALU1:IC7.16 | 14.43,52.32 14.12,52.02 14.12,50.8 ALU1:IC8.16 | ALU1:IC1.14 14.12,74.88 23.57,74.88 25.4,76.71 33.63,76.71 34.85,75.49 34.85,75.18 34.54,74.88 ALU1:IC2.14 | 14.43,52.32 14.12,52.63 10.77,52.63 v10.46,52.32 | 78.13,136.14 79.05,135.23 79.05,134.93 A_REGISTER1:IC8.16 | 78.13,136.14 77.83,136.45 60.45,136.45 59.84,135.84 59.84,134.62 A_REGISTER1:IC7.16 | 78.13,136.14 78.44,136.45 87.27,136.45 | 87.27,136.45 95.81,136.45 97.03,135.23 97.03,134.93 96.72,134.62 A_REGISTER1:IC1.1 | 79.65,102.92 80.26,102.31 80.26,101.7 ALU1:IC4.16 | 79.65,102.92 77.22,105.36 | 77.22,105.36 76.3,106.27 70.21,106.27 64.41,100.48 61.98,100.48 61.06,101.4 59.84,101.4 A_REGISTER1:IC3.16 | 100.99,100.48 100.69,100.48 97.94,103.23 79.96,103.23 79.65,102.92 | 100.99,100.48 102.21,100.48 103.12,101.4 104.04,101.4 A_REGISTER1:IC2.16 | v101.6,87.07 100.99,87.68 100.99,100.48 | 87.27,136.45 87.27,115.42 77.22,105.36 | v87.88,49.89 96.11,49.89 96.42,49.58 96.42,48.36 ALU1:IC6.1
ZF
  Bottom 0.305: ALU1:IC5.3 96.72,69.7 97.03,69.7 98.25,68.48 105.26,68.48 105.56,68.78 107.09,67.26 116.84,67.26 JP8.1
|ALUWRITE
  Bottom 0.305: ALU1:IC6.19 104.34,45.62 105.56,45.62 106.48,44.7 115.01,44.7 115.93,45.62 116.84,45.62 SV24.3
|AREAD  (via drill 0.35)
  Top 0.305: A_REGISTER1:IC3.9 59.84,84.02 59.84,86.16 A_REGISTER1:IC3.10 | A_REGISTER1:IC2.9 104.34,84.02 104.34,86.16 A_REGISTER1:IC2.10 104.04,86.46 103.43,86.46 101.91,87.99 101.3,87.99 100.99,87.68 98.25,87.68 97.94,87.99 97.64,87.68 95.5,87.68 95.2,87.38 94.59,87.38 88.19,80.97 69.6,80.97 68.99,80.37 v66.55,80.37
  Bottom 0.305: JP19.2 116.84,102.62 116.23,102.62 114.1,100.48 103.12,100.48 102.51,99.87 102.21,99.87 101.6,99.26 101.6,88.29 103.43,86.46 104.04,86.46 A_REGISTER1:IC2.10 | v66.55,80.37 61.98,80.37 59.84,82.5 59.84,83.72 A_REGISTER1:IC3.9
|AWRITE
  Bottom 0.305: A_REGISTER1:IC1.19 104.34,131.88 104.95,131.88 105.87,130.96 115.01,130.96 115.32,131.27 118.36,131.27 119.58,130.05 119.58,109.32 116.54,106.27 116.54,105.97 116.84,105.66 JP19.1
|BREAD
  Top 0.305: B_REGISTER1:IC2.9 14.12,84.02 14.12,86.16 B_REGISTER1:IC2.10 | B_REGISTER1:IC3.10 34.24,86.16 34.24,84.02 B_REGISTER1:IC3.9 34.24,83.72 33.93,83.41 33.93,83.11 38.2,78.84 58.62,78.84 62.59,82.8 62.59,95 71.12,103.53 105.26,103.53 107.09,101.7 107.09,93.47 116.54,84.02 116.84,84.02 JP18.1
  Bottom 0.305: B_REGISTER1:IC2.9 14.12,83.72 14.12,82.5 14.43,82.19 33.63,82.19 34.54,83.11 34.54,83.72 B_REGISTER1:IC3.9
|FL
  Top 0.305: ALU1:IC5.9 104.34,57.2 104.34,59.64 ALU1:IC5.10
  Bottom 0.305: SV24.1 115.93,50.8 114.71,49.58 110.74,49.58 103.73,56.59 103.73,56.9 104.04,57.2 ALU1:IC5.9

## Text on the board
tValues: A Reg/A Kaydedici | B Reg/B Kaydedici | Flags | 8Bit Bus | Control Signals | Flags | Control Signals | ALU/Mantıksal İşlem Birimi